# EAGLE board CT_schematic (EAGLE 7.6.0)

Size 100 x 80 mm. Coordinates in mm from the lower left corner, seen from the top.
Outline: 0,0 100,0 100,80 0,80 0,0
Copper layers (1*16): Top 0.035mm / dielectric 1.5mm / Bottom 0.035mm
Design rules "default": minimum track width 10mil, minimum drill 24mil, track to track 8mil, track to pad 8mil, pad to pad 8mil, via to via 8mil, smd to smd 8mil, copper to edge 40mil, drill to drill 8mil, minimum pad ring 10mil, minimum via ring 8mil, stop-mask expansion 4mil, vias tented up to drill 0mil, thermal gap 10mil

## Footprints (pad centres in the part's own frame; a part is rotated, then mirrored left to right if it is on the bottom)
C0603 = smd 0.8 x 0.8: 1 -0.762,0; 2 0.762,0
C0402 = smd 0.5 x 0.5: 1 -0.508,0; 2 0.508,0
C0805 = smd 1.2 x 1.3: 1 -1.016,0; 2 1.016,0
2220 = smd 1.85 x 5.5: 1 -2.55,0; 2 2.55,0
C1206 = smd 1.3 x 1.6: 1 -1.524,0; 2 1.524,0
C1210 = smd 1.2 x 2.5: 1 -1.524,0; 2 1.524,0
EXV-9H = smd 3.505 x 1.676: 1 -2.857,0; 2 2.857,0
L0603 = smd 0.8 x 0.8: 1 -0.762,0; 2 0.762,0
R0603 = smd 0.8 x 0.8: 1 -0.762,0; 2 0.762,0
WE-HCI_7030/7040/7050 = smd 2.5 x 3: 1 -2.45,0; 2 2.45,0
PJ-037B_PACKAGE = drill 3.7 square: 1 12,0 | drill 3.2 square: 2 6,0
LQFP176 = smd 0.3 x 1.2: 1 -10.75,-12.75; 2 -10.25,-12.75; 3 -9.75,-12.75; 4 -9.25,-12.75; 5 -8.75,-12.75; 6 -8.25,-12.75; 7 -7.75,-12.75; 8 -7.25,-12.75; 9 -6.75,-12.75; 10 -6.25,-12.75; 11 -5.75,-12.75; 12 -5.25,-12.75; 13 -4.75,-12.75; 14 -4.25,-12.75; 15 -3.75,-12.75; 16 -3.25,-12.75; 17 -2.75,-12.75; 18 -2.25,-12.75; 19 -1.75,-12.75; 20 -1.25,-12.75; 21 -0.75,-12.75; 22 -0.25,-12.75; 23 0.25,-12.75; 24 0.75,-12.75; 25 1.25,-12.75; 26 1.75,-12.75; 27 2.25,-12.75; 28 2.75,-12.75; 29 3.25,-12.75; 30 3.75,-12.75; 31 4.25,-12.75; 32 4.75,-12.75; 33 5.25,-12.75; 34 5.75,-12.75; 35 6.25,-12.75; 36 6.75,-12.75; 37 7.25,-12.75; 38 7.75,-12.75; 39 8.25,-12.75; 40 8.75,-12.75; 41 9.25,-12.75; 42 9.75,-12.75; 43 10.25,-12.75; 44 10.75,-12.75; 89 10.75,12.75; 90 10.25,12.75; 91 9.75,12.75; 92 9.25,12.75; 93 8.75,12.75; 94 8.25,12.75; 95 7.75,12.75; 96 7.25,12.75; 97 6.75,12.75; 98 6.25,12.75; 99 5.75,12.75; 100 5.25,12.75; 101 4.75,12.75; 102 4.25,12.75; 103 3.75,12.75; 104 3.25,12.75; 105 2.75,12.75; 106 2.25,12.75; 107 1.75,12.75; 108 1.25,12.75; 109 0.75,12.75; 110 0.25,12.75; 111 -0.25,12.75; 112 -0.75,12.75; 113 -1.25,12.75; 114 -1.75,12.75; 115 -2.25,12.75; 116 -2.75,12.75; 117 -3.25,12.75; 118 -3.75,12.75; 119 -4.25,12.75; 120 -4.75,12.75; 121 -5.25,12.75; 122 -5.75,12.75; 123 -6.25,12.75; 124 -6.75,12.75; 125 -7.25,12.75; 126 -7.75,12.75; 127 -8.25,12.75; 128 -8.75,12.75; 129 -9.25,12.75; 130 -9.75,12.75; 131 -10.25,12.75; 132 -10.75,12.75 | smd 1.2 x 0.3: 45 12.75,-10.75; 46 12.75,-10.25; 47 12.75,-9.75; 48 12.75,-9.25; 49 12.75,-8.75; 50 12.75,-8.25; 51 12.75,-7.75; 52 12.75,-7.25; 53 12.75,-6.75; 54 12.75,-6.25; 55 12.75,-5.75; 56 12.75,-5.25; 57 12.75,-4.75; 58 12.75,-4.25; 59 12.75,-3.75; 60 12.75,-3.25; 61 12.75,-2.75; 62 12.75,-2.25; 63 12.75,-1.75; 64 12.75,-1.25; 65 12.75,-0.75; 66 12.75,-0.25; 67 12.75,0.25; 68 12.75,0.75; 69 12.75,1.25; 70 12.75,1.75; 71 12.75,2.25; 72 12.75,2.75; 73 12.75,3.25; 74 12.75,3.75; 75 12.75,4.25; 76 12.75,4.75; 77 12.75,5.25; 78 12.75,5.75; 79 12.75,6.25; 80 12.75,6.75; 81 12.75,7.25; 82 12.75,7.75; 83 12.75,8.25; 84 12.75,8.75; 85 12.75,9.25; 86 12.75,9.75; 87 12.75,10.25; 88 12.75,10.75; 133 -12.75,10.75; 134 -12.75,10.25; 135 -12.75,9.75; 136 -12.75,9.25; 137 -12.75,8.75; 138 -12.75,8.25; 139 -12.75,7.75; 140 -12.75,7.25; 141 -12.75,6.75; 142 -12.75,6.25; 143 -12.75,5.75; 144 -12.75,5.25; 145 -12.75,4.75; 146 -12.75,4.25; 147 -12.75,3.75; 148 -12.75,3.25; 149 -12.75,2.75; 150 -12.75,2.25; 151 -12.75,1.75; 152 -12.75,1.25; 153 -12.75,0.75; 154 -12.75,0.25; 155 -12.75,-0.25; 156 -12.75,-0.75; 157 -12.75,-1.25; 158 -12.75,-1.75; 159 -12.75,-2.25; 160 -12.75,-2.75; 161 -12.75,-3.25; 162 -12.75,-3.75; 163 -12.75,-4.25; 164 -12.75,-4.75; 165 -12.75,-5.25; 166 -12.75,-5.75; 167 -12.75,-6.25; 168 -12.75,-6.75; 169 -12.75,-7.25; 170 -12.75,-7.75; 171 -12.75,-8.25; 172 -12.75,-8.75; 173 -12.75,-9.25; 174 -12.75,-9.75; 175 -12.75,-10.25; 176 -12.75,-10.75
TST-110-05-T-D-RA = drill 1 pad 1.7 square: 1 0,0 | drill 1 pad 1.7: 2 0,2.54; 3 2.54,0; 4 2.54,2.54; 5 5.08,0; 6 5.08,2.54; 7 7.62,0; 8 7.62,2.54; 9 10.16,0; 10 10.16,2.54; 11 12.7,0; 12 12.7,2.54; 13 15.24,0; 14 15.24,2.54; 15 17.78,0; 16 17.78,2.54; 17 20.32,0; 18 20.32,2.54; 19 22.86,0; 20 22.86,2.54
SOT-23-8 = smd 0.4 x 1.2: 1 -0.975,-1.3; 2 -0.325,-1.3; 3 0.325,-1.3; 4 0.975,-1.3; 5 0.975,1.3; 6 0.325,1.3; 7 -0.325,1.3; 8 -0.975,1.3
182-009-MALE = drill 1.194 pad 1.524 octagon: 1 -5.537,10.923; 2 -2.769,10.923; 3 0,10.923; 4 2.769,10.923; 5 5.537,10.923; 6 -4.153,8.08; 7 -1.384,8.08; 8 1.384,8.08; 9 4.153,8.08 | hole 3.048: -12.446,9.501; 12.446,9.501
MOLEX_47219-2001 = smd 0.8 x 1.5: 1 3.2,-2.1; 2 2.1,-2.1; 3 1,-2.1; 4 -0.1,-2.1; 5 -1.2,-2.1; 6 -2.3,-2.1; 7 -3.4,-2.1; 8 -4.5,-2.1 | smd 1.5 x 2.05: G1 6.875,-4.7; G2 6.875,3.6; G3 -6.875,3.6; G4 -6.875,-4.7
RTL8201FL-VB-CG = smd 0.27 x 1: 1 0,0; 2 0.5,0; 3 1,0; 4 1.5,0; 5 2,0; 6 2.5,0; 7 3,0; 8 3.5,0; 9 4,0; 10 4.5,0; 11 5,0; 12 5.5,0; 25 5.5,8; 26 5,8; 27 4.5,8; 28 4,8; 29 3.5,8; 30 3,8; 31 2.5,8; 32 2,8; 33 1.5,8; 34 1,8; 35 0.5,8; 36 0,8 | smd 1 x 0.27: 13 6.75,1.25; 14 6.75,1.75; 15 6.75,2.25; 16 6.75,2.75; 17 6.75,3.25; 18 6.75,3.75; 19 6.75,4.25; 20 6.75,4.75; 21 6.75,5.25; 22 6.75,5.75; 23 6.75,6.25; 24 6.75,6.75; 37 -1.25,6.75; 38 -1.25,6.25; 39 -1.25,5.75; 40 -1.25,5.25; 41 -1.25,4.75; 42 -1.25,4.25; 43 -1.25,3.75; 44 -1.25,3.25; 45 -1.25,2.75; 46 -1.25,2.25; 47 -1.25,1.75; 48 -1.25,1.25
7498011122R = smd 0.71 x 2.29: 1 -3.545,-3.18; 2 -2.525,-3.18; 3 -1.505,-3.18; 4 -0.485,-3.18; 5 0.535,-3.18; 6 1.555,-3.18; 8 3.595,-3.18; 9 5.635,-3.18; 10 6.655,-3.18; 11 -6.605,-3.18; 12 -5.585,-3.18 | smd 1.4 x 2.54: 13 -8.51,10.2; 14 8.51,10.2 | hole 1.4: -3.5,0; 3.5,0
S29VS256RABBHW000 = smd 0.3 x 0.3: A1 -6,3; A14 0.5,3; C3 -5,2; C4 -4.5,2; C5 -4,2; C6 -3.5,2; C7 -3,2; C8 -2.5,2; C9 -2,2; C10 -1.5,2; C11 -1,2; C12 -0.5,2; D3 -5,1.5; D4 -4.5,1.5; D5 -4,1.5; D6 -3.5,1.5; D7 -3,1.5; D8 -2.5,1.5; D9 -2,1.5; D10 -1.5,1.5; D11 -1,1.5; D12 -0.5,1.5; E3 -5,1; E4 -4.5,1; E5 -4,1; E6 -3.5,1; E7 -3,1; E8 -2.5,1; E9 -2,1; E10 -1.5,1; E11 -1,1; E12 -0.5,1; F3 -5,0.5; F4 -4.5,0.5; F5 -4,0.5; F6 -3.5,0.5; F7 -3,0.5; F8 -2.5,0.5; F9 -2,0.5; F10 -1.5,0.5; F11 -1,0.5; F12 -0.5,0.5; H1 -6,-0.5; H14 0.5,-0.5
ABS07-32.768KHZ-7-T = smd 1.1 x 2.4: 1 -2.5,0; 2 0,0
ABLS-25.000MHZ-B2F-T = smd 5.6 x 2.8: 1 -3.81,0; 2 5.69,0
QFN-16_EP = smd 0.805 x 0.3: 1 -1.452,0.75; 2 -1.452,0.25; 3 -1.452,-0.25; 4 -1.452,-0.75; 9 1.452,-0.75; 10 1.452,-0.25; 11 1.452,0.25; 12 1.452,0.75 | smd 0.3 x 0.805: 5 -0.75,-1.452; 6 -0.25,-1.452; 7 0.25,-1.452; 8 0.75,-1.452; 13 0.75,1.452; 14 0.25,1.452; 15 -0.25,1.452; 16 -0.75,1.452 | smd 1.55 x 1.55: 17 0,0
WSON-8 = smd 0.3 x 0.6: 1 -0.75,0; 2 0.05,0; 3 0.85,0; 4 1.65,0; 5 1.65,3.8; 6 0.85,3.8; 7 0.05,3.8; 8 -0.75,3.8 | smd 3 x 2.6: PAD 0.45,1.9
SON-6 = smd 0.55 x 0.3: 1 -0.355,0.5 | smd 0.52 x 0.3: 2 -0.37,0; 3 -0.37,-0.5; 4 0.37,-0.5; 5 0.37,0; 6 0.37,0.5
DCU0008A_N = smd 0.5 x 0.3: 1 -1.6,0.75; 2 -1.6,0.25; 3 -1.6,-0.25; 4 -1.6,-0.75; 5 1.6,-0.75; 6 1.6,-0.25; 7 1.6,0.25; 8 1.6,0.75
SW_4-1437565-2 = smd 1.4 x 2.1: 1 -2.23,4.55; 2 -2.23,-4.55; 3 2.23,4.55; 4 2.23,-4.55
LGM67K-G1J2-24-Z = smd 0.8 x 1.4: A -2,0; C 0,0
NC7SZ125M5X = smd 1.3 x 0.7: 1 -1.3,0.95; 2 -1.3,0; 3 -1.3,-0.95; 4 1.3,-0.95; 5 1.3,0.95

## Placement (x,y rotation side)
C1  1e-06  [C0603]  -22.86,82.55 0 top  (outside the outline)
C2  1e-07  [C0603]  -26.67,82.55 0 top  (outside the outline)
C3  1e-07  [C0603]  -30.48,82.55 0 top  (outside the outline)
C4  1e-07  [C0603]  -34.29,82.55 0 top  (outside the outline)
C5  1e-07  [C0603]  -38.1,82.55 0 top  (outside the outline)
C6  1e-07  [C0603]  -41.91,82.55 0 top  (outside the outline)
C7  1e-07  [C0603]  -45.72,82.55 0 top  (outside the outline)
C8  1e-07  [C0603]  -49.53,82.55 0 top  (outside the outline)
C9  1e-07  [C0603]  -53.34,82.55 0 top  (outside the outline)
C10  1e-07  [C0603]  -57.15,82.55 0 top  (outside the outline)
C11  1e-07  [C0603]  -60.96,82.55 0 top  (outside the outline)
C12  1e-07  [C0603]  -64.77,82.55 0 top  (outside the outline)
C13  1e-07  [C0603]  -68.58,82.55 0 top  (outside the outline)
C14  1e-07  [C0603]  -72.39,82.55 0 top  (outside the outline)
C15  1e-07  [C0603]  -76.2,82.55 0 top  (outside the outline)
C16  1e-07  [C0603]  -80.01,82.55 0 top  (outside the outline)
C17  1e-07  [C0603]  -83.82,82.55 0 top  (outside the outline)
C18  4.7e-06  [C0603]  -85.09,77.47 0 top  (outside the outline)
C19  2.2e-06  [C0603]  -88.9,77.47 0 top  (outside the outline)
C20  2.2e-06  [C0603]  -92.71,77.47 0 top  (outside the outline)
C21  1e-08  [C0603]  -87.63,82.55 0 top  (outside the outline)
C22  1e-06  [C0603]  -91.44,82.55 0 top  (outside the outline)
C23  1e-11  [C0402]  -22.86,92.71 0 top  (outside the outline)
C24  1e-11  [C0402]  -26.67,92.71 0 top  (outside the outline)
C25  1e-11  [C0402]  -30.48,92.71 0 top  (outside the outline)
C26  1e-11  [C0402]  -34.29,92.71 0 top  (outside the outline)
C27  1e-07  [C0402]  -38.1,92.71 0 top  (outside the outline)
C28  1e-07  [C0402]  -41.91,92.71 0 top  (outside the outline)
C29  1e-07  [C0402]  -45.72,92.71 0 top  (outside the outline)
C30  1e-07  [C0402]  -49.53,92.71 0 top  (outside the outline)
C31  1e-05  [C0805]  -71.12,64.77 0 top  (outside the outline)
C32  2.2e-08  [C0402]  -95.25,87.63 0 top  (outside the outline)
C33  1e-06  [C0603]  -95.25,82.55 0 top  (outside the outline)
C34  1e-07  [C0402]  -53.34,92.71 0 top  (outside the outline)
C35  1e-08  [C0402]  -57.15,92.71 0 top  (outside the outline)
C36  1e-06  [C0603]  -15.24,87.63 0 top  (outside the outline)
C37  1e-07  [C0402]  -60.96,92.71 0 top  (outside the outline)
C38  1e-08  [C0402]  -64.77,92.71 0 top  (outside the outline)
C39  1e-07  [C0402]  -68.58,92.71 0 top  (outside the outline)
C40  1e-07  [C0402]  -72.39,92.71 0 top  (outside the outline)
C41  2.7e-11  [C0402]  -15.24,92.71 0 top  (outside the outline)
C42  2.7e-11  [C0402]  -19.05,92.71 0 top  (outside the outline)
C43  1e-07  [C0402]  -76.2,92.71 0 top  (outside the outline)
C44  2.2e-06  [C0603]  -15.24,82.55 0 top  (outside the outline)
C45  1e-07  [C0402]  -80.01,92.71 0 top  (outside the outline)
C46  2.2e-06  [C0603]  -19.05,82.55 0 top  (outside the outline)
C47  1e-05  [C0805]  -76.2,64.77 0 top  (outside the outline)
C48  1e-06  [C0603]  -19.05,87.63 0 top  (outside the outline)
C49  1e-07  [C0402]  -83.82,92.71 0 top  (outside the outline)
C50  6.8e-05  [2220]  -16.51,49.53 0 top  (outside the outline)
C51  1e-08  [C0402]  -87.63,92.71 0 top  (outside the outline)
C52  1e-05  [C1206]  -35.56,64.77 0 top  (outside the outline)
C53  1e-05  [C1210]  -29.21,66.04 0 top  (outside the outline)
C54  1e-07  [C0402]  -91.44,92.71 0 top  (outside the outline)
C55  0.0001  [EXV-9H]  -17.78,58.42 0 top  (outside the outline)
C56  0.0001  [EXV-9H]  -29.21,58.42 0 top  (outside the outline)
C57  1e-08  [C0402]  -95.25,92.71 0 top  (outside the outline)
C58  1e-07  [C0402]  -15.24,97.79 0 top  (outside the outline)
C59  1e-08  [C0402]  -19.05,97.79 0 top  (outside the outline)
C60  1e-07  [C0402]  -22.86,97.79 0 top  (outside the outline)
C61  1e-08  [C0402]  -26.67,97.79 0 top  (outside the outline)
C62  1e-08  [C0402]  -30.48,97.79 0 top  (outside the outline)
C63  1e-08  [C0402]  -34.29,97.79 0 top  (outside the outline)
C64  1e-08  [C0402]  -38.1,97.79 0 top  (outside the outline)
F1  240.0  [L0603]  -22.86,87.63 0 top  (outside the outline)
I1  97.0  [R0603]  -26.67,87.63 0 top  (outside the outline)
I5  3.3e-06  [WE-HCI_7030/7040/7050]  -69.85,34.29 0 top  (outside the outline)
J1  PJ-037B  [PJ-037B_PACKAGE]  -64.77,35.56 0 top  (outside the outline)
R2  1000.0  [R0603]  -30.48,87.63 0 top  (outside the outline)
R4  4700.0  [R0603]  -34.29,87.63 0 top  (outside the outline)
R5  4700.0  [R0603]  -38.1,87.63 0 top  (outside the outline)
R6  4700.0  [R0603]  -41.91,87.63 0 top  (outside the outline)
R7  2200.0  [R0603]  -45.72,87.63 0 top  (outside the outline)
R8  2200.0  [R0603]  -49.53,87.63 0 top  (outside the outline)
R9  10000.0  [R0603]  -55.88,72.39 0 top  (outside the outline)
R10  10000.0  [R0603]  -60.96,72.39 0 top  (outside the outline)
R11  10000.0  [R0603]  -66.04,72.39 0 top  (outside the outline)
R12  10000.0  [R0603]  -71.12,72.39 0 top  (outside the outline)
R13  10000.0  [R0603]  -76.2,72.39 0 top  (outside the outline)
R14  10000.0  [R0603]  -81.28,72.39 0 top  (outside the outline)
R15  10000.0  [R0603]  -86.36,72.39 0 top  (outside the outline)
R16  120.0  [R0603]  -53.34,87.63 0 top  (outside the outline)
R17  100000.0  [R0603]  -81.28,64.77 0 top  (outside the outline)
R18  100000.0  [R0603]  -86.36,64.77 0 top  (outside the outline)
R19  100000.0  [R0603]  -91.44,64.77 0 top  (outside the outline)
R20  100000.0  [R0603]  -15.24,72.39 0 top  (outside the outline)
R21  100000.0  [R0603]  -20.32,72.39 0 top  (outside the outline)
R22  100000.0  [R0603]  -25.4,72.39 0 top  (outside the outline)
R23  0.1  [R0603]  -57.15,87.63 0 top  (outside the outline)
R24  0.1  [R0603]  -60.96,87.63 0 top  (outside the outline)
R25  200.0  [R0603]  -64.77,87.63 0 top  (outside the outline)
R26  200.0  [R0603]  -68.58,87.63 0 top  (outside the outline)
R27  2490.0  [R0603]  -72.39,87.63 0 top  (outside the outline)
R28  4700.0  [R0603]  -76.2,87.63 0 top  (outside the outline)
R29  10000.0  [R0603]  -91.44,72.39 0 top  (outside the outline)
R30  10000.0  [R0603]  -15.24,77.47 0 top  (outside the outline)
R31  10000.0  [R0603]  -20.32,77.47 0 top  (outside the outline)
R32  10000.0  [R0603]  -25.4,77.47 0 top  (outside the outline)
R33  10000.0  [R0603]  -30.48,77.47 0 top  (outside the outline)
R34  10000.0  [R0603]  -35.56,77.47 0 top  (outside the outline)
R35  10000.0  [R0603]  -40.64,77.47 0 top  (outside the outline)
R36  10000.0  [R0603]  -45.72,77.47 0 top  (outside the outline)
R37  10000.0  [R0603]  -50.8,77.47 0 top  (outside the outline)
R38  10000.0  [R0603]  -55.88,77.47 0 top  (outside the outline)
R39  20000.0  [R0603]  -60.96,77.47 0 top  (outside the outline)
R40  39000.0  [R0603]  -66.04,77.47 0 top  (outside the outline)
R41  300000.0  [R0603]  -30.48,72.39 0 top  (outside the outline)
R42  100000.0  [R0603]  -35.56,72.39 0 top  (outside the outline)
R43  2231.0  [R0603]  -80.01,87.63 0 top  (outside the outline)
R44  1000.0  [R0603]  -83.82,87.63 0 top  (outside the outline)
R45  10000.0  [R0603]  -71.12,77.47 0 top  (outside the outline)
R46  10000.0  [R0603]  -76.2,77.47 0 top  (outside the outline)
R47  82000.0  [R0603]  -81.28,77.47 0 top  (outside the outline)
R48  300000.0  [R0603]  -40.64,72.39 0 top  (outside the outline)
R49  120000.0  [R0603]  -45.72,72.39 0 top  (outside the outline)
R50  200000.0  [R0603]  -50.8,72.39 0 top  (outside the outline)
U1  STM32F207ICT6  [LQFP176]  -45.72,13.97 0 top  (outside the outline)
U2  TST-110-05-T-D-RA  [TST-110-05-T-D-RA]  -95.25,46.99 0 top  (outside the outline)
U3  MAX3051EKA+T  [SOT-23-8]  -40.64,64.77 0 top  (outside the outline)
U4  182-009-113R531  [182-009-MALE]  -82.55,6.35 0 top  (outside the outline)
U5  0472192001  [MOLEX_47219-2001]  -22.86,36.83 0 top  (outside the outline)
U6  RTL8201FL-VB-CG  [RTL8201FL-VB-CG]  -48.26,31.75 0 top  (outside the outline)
U7  7498011122R  [7498011122R]  -22.86,7.62 0 top  (outside the outline)
U8  S29VS256RABBHW000  [S29VS256RABBHW000]  -53.34,48.26 0 top  (outside the outline)
U9  ABS07-32.768KHZ-7-T  [ABS07-32.768KHZ-7-T]  -91.44,58.42 0 top  (outside the outline)
U10  ABLS-25.000MHZ-B2F-T  [ABLS-25.000MHZ-B2F-T]  -48.26,58.42 0 top  (outside the outline)
U11  ABLS-25.000MHZ-B2F-T  [ABLS-25.000MHZ-B2F-T]  -68.58,58.42 0 top  (outside the outline)
U12  LTC3601EUD#PBF  [QFN-16_EP]  -88.9,87.63 0 top  (outside the outline)
U13  LP3878SDX-ADJ/NOPB  [WSON-8]  -38.1,48.26 0 top  (outside the outline)
U14  TPS3895ADRYR  [SON-6]  -55.88,96.52 0 top  (outside the outline)
U15  LSF0102DCTR  [DCU0008A_N]  -50.8,96.52 0 top  (outside the outline)
U16  4-1437565-2  [SW_4-1437565-2]  -88.9,34.29 0 top  (outside the outline)
U17  Q65110A2395  [LGM67K-G1J2-24-Z]  -17.78,66.04 0 top  (outside the outline)
U18  nc7sz125m5x  [NC7SZ125M5X]  -45.72,64.77 0 top  (outside the outline)
U19  nc7sz125m5x  [NC7SZ125M5X]  -52.07,64.77 0 top  (outside the outline)
U20  nc7sz125m5x  [NC7SZ125M5X]  -58.42,64.77 0 top  (outside the outline)
U21  nc7sz125m5x  [NC7SZ125M5X]  -64.77,64.77 0 top  (outside the outline)

## Library data of the parts
C1-C64 F1 I1 I5 J1 R2 R4-R50 U1-U21 = circuit_tree

## Nets
CLK_CRYSTAL_U1_9: C23.1 U1.9 U9.1
CLK_CRYSTAL_U1_10: C24.1 U1.10 U9.2
CLK_CRYSTAL_U1_29: C25.1 U1.29 U10.1
CLK_CRYSTAL_U1_30: C26.1 U1.30 U10.2
CLK_CRYSTAL_U6_42: C42.1 U6.42 U11.1
CLK_CRYSTAL_U6_43: C41.1 U6.43 U11.2
GND: C1.2 C2.2 C3.2 C4.2 C5.2 C6.2 C7.2 C8.2 C9.2 C10.2 C11.2 C12.2 C13.2 C14.2 C15.2 C16.2 C17.2 C18.2 C19.2 C20.2 C21.2 C22.2 C23.2 C24.2 C25.2 C26.2 C27.2 C28.2 C29.2 C30.2 C31.2 C32.2 C33.2 C34.2 C35.2 C36.2 C37.2 C38.2 C39.2 C40.2 C41.2 C42.2 C43.2 C44.2 C45.2 C46.2 C47.2 C48.2 C50.1 C50.2 C51.2 C52.2 C53.2 C54.2 C55.2 C56.2 C57.2 C58.2 C59.2 C60.2 C61.2 C62.2 C63.2 C64.2 J1.2 R2.2 R9.2 R15.2 R23.2 R24.2 R27.2 R29.2 R32.2 R39.2 R41.2 R44.2 R47.2 R49.2 U1.14 U1.22 U1.37 U1.48 U1.61 U1.71 U1.90 U1.102 U1.113 U1.126 U1.135 U1.148 U1.158 U2.4 U2.6 U2.8 U2.10 U2.12 U2.14 U2.16 U2.18 U2.20 U3.2 U3.8 U4.5 U5.6 U5.G1 U5.G2 U5.G3 U5.G4 U6.7 U6.20 U6.33 U6.47 U8.C5 U8.D12 U8.E3 U8.F5 U12.1 U12.9 U12.17 U13.3 U13.PAD U14.2 U15.1 U17.C U18.2 U18.3 U19.1 U19.3 U20.1 U20.3 U21.1 U21.3
NET_U1_31: R6.1 U1.31 U21.4
NET_U1_33: R7.1
NET_U1_39: C21.1 C22.1 F1.1 U1.38 U1.39
NET_U1_42: R8.1
NET_U1_81: C19.1 U1.81
NET_U1_125: C20.1 U1.125
NET_U1_166: R9.1 U1.166
NET_U1_175: U17.A
NET_U1_176: U16.3 U16.4
NET_U2_19: R15.1 U2.19
NET_U3_6: R16.2 U3.6
NET_U4_2: R16.2 U3.6 U4.2
NET_U4_3: R16.1 U3.7 U4.3
NET_U6_6: C33.1 C34.1 C35.1 I1.1 U6.6 U6.41
NET_U6_10: R32.1 U6.10
NET_U6_13: R29.1 U6.13
NET_U6_18: R33.1 U6.18
NET_U6_28: U6.28
NET_U6_29: R4.1 U6.29 U19.4
NET_U6_32: R28.1 U6.32
NET_U6_34: R30.1 U6.34
NET_U6_35: R31.1 U6.35
NET_U6_39: R34.1 U6.39
NET_U6_40: C40.1 U6.40
NET_U6_46: R27.1 U6.46
NET_U6_48: C39.1 U6.48
NET_U7_1: U6.1 U7.1
NET_U7_3: U6.2 U7.3
NET_U7_4: U6.4 U7.4
NET_U7_5: C32.1 U7.2 U7.5
NET_U7_6: U6.5 U7.6
NET_U7_8: R24.1 U7.8
NET_U7_10: R25.1 U7.10
NET_U7_12: R26.1 U7.12
NET_U7_13: R23.1 U7.13 U7.14
NET_U7_34: R25.2
NET_U7_35: R26.2
NET_U8_C9: U8.C9
NET_U8_D8: R5.1 U8.D8 U20.4
NET_U12_3: C49.2 I5.1 U12.3 U12.4
NET_U12_6: C49.1 U12.6
NET_U12_7: C48.1 U12.7 U12.12
NET_U12_10: R41.1 U12.10
NET_U12_11: R39.1 R40.1 U12.11
NET_U12_14: U12.14
NET_U12_ATNET_3: I5.2 R40.2
NET_U13_1: C51.1 U13.1
NET_U13_6: R43.2 R44.1 U13.6
NET_U13_8: R42.1 U13.8
NET_U14_1: R46.1 R47.1 U14.1
NET_U14_3: R48.2 R49.1 U14.3
NET_U14_4: R45.1 U14.4 U18.4 U19.2 U20.2 U21.2
NET_U15_8: R50.1 U15.8
NET_U16_1: R2.1 U16.1 U16.2
PROC_CAN1_RX_TOIOBUF: U15.4
PROC_CAN1_RX_TOXCVR: U3.4 U15.5
PROC_CAN1_TX_TOIOBUF: U15.3
PROC_CAN1_TX_TOXCVR: U3.1 U15.6
PROC_FSMC_A16: U1.99 U8.D4
PROC_FSMC_A17: U1.100 U8.C11
PROC_FSMC_A18: U1.101 U8.D10
PROC_FSMC_A19: U1.2 U8.C10
PROC_FSMC_A20: U1.3 U8.D5
PROC_FSMC_A21: U1.4 U8.C4
PROC_FSMC_A22: U1.5 U8.C12
PROC_FSMC_A23: U1.1 U8.D7
PROC_FSMC_CLK: U1.145 U8.C6
PROC_FSMC_D0: U1.104 U8.F3
PROC_FSMC_D1: U1.105 U8.F4
PROC_FSMC_D2: U1.142 U8.E6
PROC_FSMC_D3: U1.143 U8.E7
PROC_FSMC_D4: U1.68 U8.F8
PROC_FSMC_D5: U1.69 U8.F9
PROC_FSMC_D6: U1.70 U8.E10
PROC_FSMC_D7: U1.73 U8.E11
PROC_FSMC_D8: U1.74 U8.E4
PROC_FSMC_D9: U1.75 U8.E5
PROC_FSMC_D10: U1.76 U8.F6
PROC_FSMC_D11: U1.77 U8.F7
PROC_FSMC_D12: U1.78 U8.E8
PROC_FSMC_D13: U1.96 U8.E9
PROC_FSMC_D14: U1.97 U8.F11
PROC_FSMC_D15: U1.98 U8.F12
PROC_FSMC_NE1: R36.1 U1.151 U8.D11
PROC_FSMC_NL: U1.165 U8.D6
PROC_FSMC_NOE: R38.1 U1.146 U8.E12
PROC_FSMC_NWAIT: R35.1 U1.150 U8.C3
PROC_FSMC_NWE: R37.1 U1.147 U8.C8
PROC_SDIO_CK: R18.1 U1.141 U5.5
PROC_SDIO_CMD: R17.1 U1.144 U5.3
PROC_SDIO_D0: R19.1 U1.117 U5.7
PROC_SDIO_D1: R20.1 U1.118 U5.8
PROC_SDIO_D2: R21.1 U1.139 U5.1
PROC_SDIO_D3: R22.1 U1.140 U5.2
PROC_SYS_JTDI: R11.1 U1.138 U2.5
PROC_SYS_JTDO_SWO: U1.161 U2.13
PROC_SYS_JTMS_SWDIO: R12.1 U1.124 U2.7
PROC_SYS_JTRST: R10.1 U1.162 U2.3
PROC_SYS_TRACECLK: R13.1 U1.137 U2.9
RST_OUT_U2_SRESET_B: R14.1 U2.15 U18.1
VCC_S1_8V9: C47.1 C52.1 C55.1 C56.1 J1.1 R42.2 U12.15 U12.16 U13.4
VCC_TIER1_1V8: C1.1 C2.1 C3.1 C4.1 C5.1 C6.1 C7.1 C8.1 C9.1 C10.1 C11.1 C12.1 C13.1 C14.1 C15.1 C16.1 C17.1 C18.1 C28.1 C30.1 C31.1 C43.1 C44.1 C45.1 C46.1 C50.2 C54.1 C59.1 C60.1 C61.1 C62.1 C63.1 C64.1 F1.2 I5.2 R5.2 R6.2 R7.2 R8.2 R10.2 R11.2 R12.2 R13.2 R14.2 R17.2 R18.2 R19.2 R20.2 R21.2 R22.2 R35.2 R36.2 R37.2 R38.2 R40.2 R45.2 R46.2 R48.1 U1.6 U1.15 U1.23 U1.36 U1.49 U1.62 U1.72 U1.82 U1.91 U1.103 U1.114 U1.127 U1.136 U1.149 U1.159 U1.172 U2.1 U5.4 U8.C7 U8.D3 U8.F10 U12.8 U14.6 U15.2 U18.5 U19.5 U20.5 U21.5
VCC_TIER1_3V3: C27.1 C29.1 C36.1 C37.1 C38.1 C53.1 C57.1 C58.1 I1.2 R4.2 R28.2 R30.2 R31.2 R33.2 R34.2 R43.1 R50.2 U2.2 U3.3 U6.15 U6.21 U6.37 U7.9 U7.11 U13.5 U15.7

## Tracks (layer width: path | path; a pad name or v marks a point on that pad's centre or on a via)
CLK_CRYSTAL_U1_9  (2 unrouted)
CLK_CRYSTAL_U1_10  (2 unrouted)
CLK_CRYSTAL_U1_29  (2 unrouted)
CLK_CRYSTAL_U1_30  (2 unrouted)
CLK_CRYSTAL_U6_42  (2 unrouted)
CLK_CRYSTAL_U6_43  (2 unrouted)
GND  (131 unrouted)
NET_U1_31  (2 unrouted)
NET_U1_39  (4 unrouted)
NET_U1_81  (1 unrouted)
NET_U1_125  (1 unrouted)
NET_U1_166  (1 unrouted)
NET_U1_176  (1 unrouted)
NET_U2_19  (1 unrouted)
NET_U3_6  (1 unrouted)
NET_U4_2  (2 unrouted)
NET_U4_3  (2 unrouted)
NET_U6_6  (5 unrouted)
NET_U6_10  (1 unrouted)
NET_U6_13  (1 unrouted)
NET_U6_18  (1 unrouted)
NET_U6_29  (2 unrouted)
NET_U6_32  (1 unrouted)
NET_U6_34  (1 unrouted)
NET_U6_35  (1 unrouted)
NET_U6_39  (1 unrouted)
NET_U6_40  (1 unrouted)
NET_U6_46  (1 unrouted)
NET_U6_48  (1 unrouted)
NET_U7_1  (1 unrouted)
NET_U7_3  (1 unrouted)
NET_U7_4  (1 unrouted)
NET_U7_5  (2 unrouted)
NET_U7_6  (1 unrouted)
NET_U7_8  (1 unrouted)
NET_U7_10  (1 unrouted)
NET_U7_12  (1 unrouted)
NET_U7_13  (2 unrouted)
NET_U8_D8  (2 unrouted)
NET_U12_3  (3 unrouted)
NET_U12_6  (1 unrouted)
NET_U12_7  (2 unrouted)
NET_U12_10  (1 unrouted)
NET_U12_11  (2 unrouted)
NET_U12_ATNET_3  (1 unrouted)
NET_U13_1  (1 unrouted)
NET_U13_6  (2 unrouted)
NET_U13_8  (1 unrouted)
NET_U14_1  (2 unrouted)
NET_U14_3  (2 unrouted)
NET_U14_4  (5 unrouted)
NET_U15_8  (1 unrouted)
NET_U16_1  (2 unrouted)
PROC_CAN1_RX_TOXCVR  (1 unrouted)
PROC_CAN1_TX_TOXCVR  (1 unrouted)
PROC_FSMC_A16  (1 unrouted)
PROC_FSMC_A17  (1 unrouted)
PROC_FSMC_A18  (1 unrouted)
PROC_FSMC_A19  (1 unrouted)
PROC_FSMC_A20  (1 unrouted)
PROC_FSMC_A21  (1 unrouted)
PROC_FSMC_A22  (1 unrouted)
PROC_FSMC_A23  (1 unrouted)
PROC_FSMC_CLK  (1 unrouted)
PROC_FSMC_D0  (1 unrouted)
PROC_FSMC_D1  (1 unrouted)
PROC_FSMC_D2  (1 unrouted)
PROC_FSMC_D3  (1 unrouted)
PROC_FSMC_D4  (1 unrouted)
PROC_FSMC_D5  (1 unrouted)
PROC_FSMC_D6  (1 unrouted)
PROC_FSMC_D7  (1 unrouted)
PROC_FSMC_D8  (1 unrouted)
PROC_FSMC_D9  (1 unrouted)
PROC_FSMC_D10  (1 unrouted)
PROC_FSMC_D11  (1 unrouted)
PROC_FSMC_D12  (1 unrouted)
PROC_FSMC_D13  (1 unrouted)
PROC_FSMC_D14  (1 unrouted)
PROC_FSMC_D15  (1 unrouted)
PROC_FSMC_NE1  (2 unrouted)
PROC_FSMC_NL  (1 unrouted)
PROC_FSMC_NOE  (2 unrouted)
PROC_FSMC_NWAIT  (2 unrouted)
PROC_FSMC_NWE  (2 unrouted)
PROC_SDIO_CK  (2 unrouted)
PROC_SDIO_CMD  (2 unrouted)
PROC_SDIO_D0  (2 unrouted)
PROC_SDIO_D1  (2 unrouted)
PROC_SDIO_D2  (2 unrouted)
PROC_SDIO_D3  (2 unrouted)
PROC_SYS_JTDI  (2 unrouted)
PROC_SYS_JTDO_SWO  (1 unrouted)
PROC_SYS_JTMS_SWDIO  (2 unrouted)
PROC_SYS_JTRST  (2 unrouted)
PROC_SYS_TRACECLK  (2 unrouted)
RST_OUT_U2_SRESET_B  (2 unrouted)
VCC_S1_8V9  (8 unrouted)
VCC_TIER1_1V8  (85 unrouted)
VCC_TIER1_3V3  (25 unrouted)